# Altium PCB Pulp FMC Sensor Board_8X64Mbits_HyperRam.PcbDoc (part 3 of 3)
Units mm, origin at the board's own origin, x right, y up, seen from the top; angles counter-clockwise.
Board outline 72.9 x 68.96 mm, 4 copper layers (Top Layer, GND, PWR, Bottom Layer), stack 1.56 mm thick; 43 components, 37 nets, 422 pads, 283 vias.
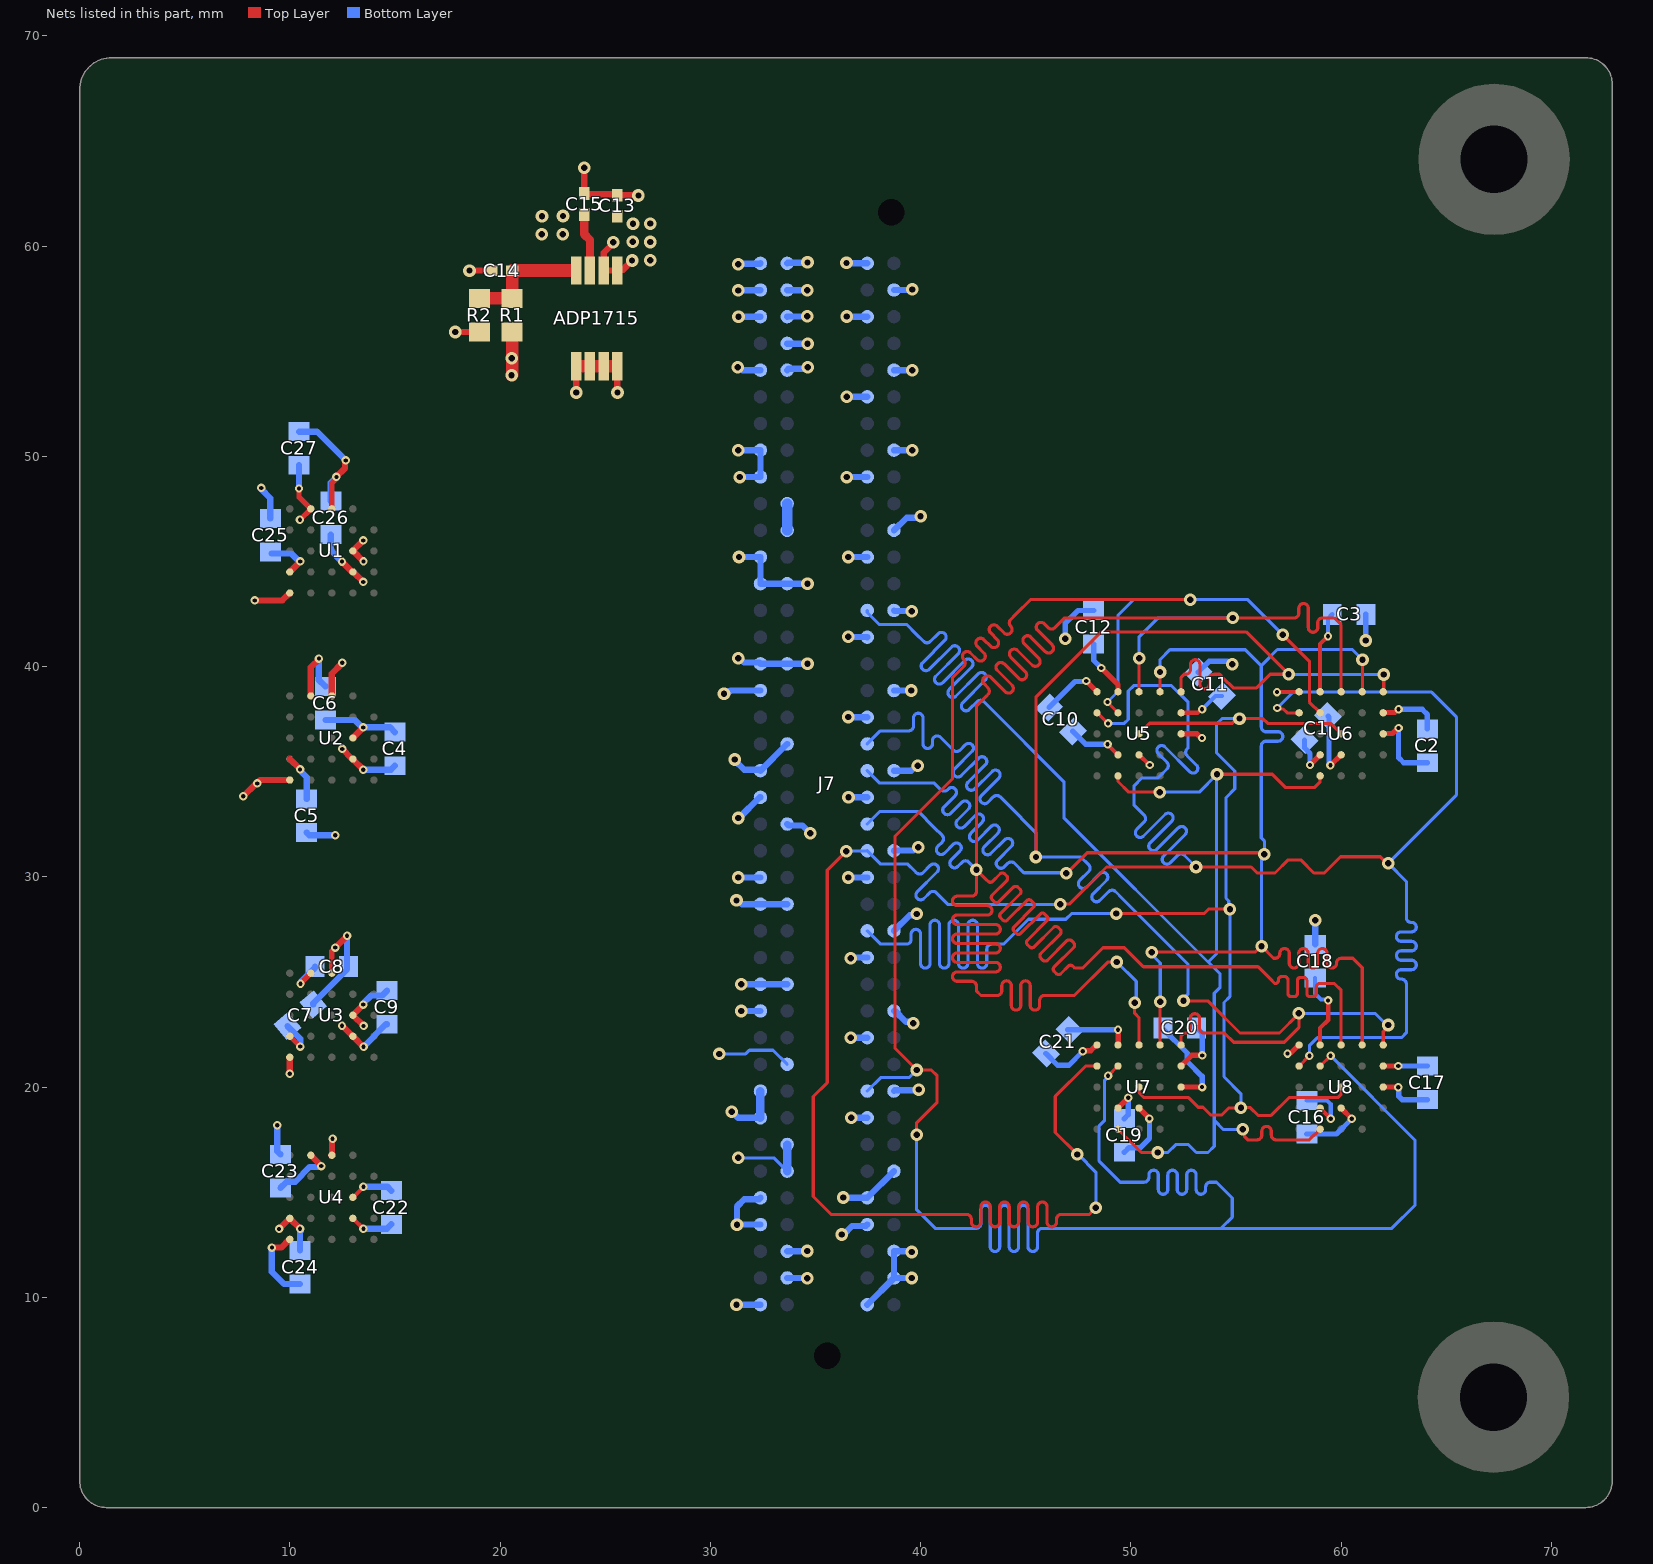
[diagram p5: the nets of this part, all layers, seen from the top]

## Via types
v1: diameter 0.6, hole 0.3, Top Layer to Bottom Layer, tented both sides, 210 vias
v2: diameter 0.4, hole 0.2, Top Layer to Bottom Layer, tented both sides, 73 vias

## Nets (pads, with @x,y where several pads share a name; then routed paths per layer and width w, separated by ;. In a path a pad name is that pad's centre, name@x,y a point inside that pad or via, vN(x,y) a via of type N, cw(c..) or ccw(c..) an arc to the next point about the centre after c; other vN are vias at no path point) (continued)
FMC_HYPER_D3: J7.G9 U5.D4 U6.D4 U7.D4 U8.D4 | length 131.1
  Top Layer w0.15: v1(39.809,17.734) 39.809,18.303 40.785,19.279 40.785,20.537 40.508,20.813 v1(39.809,20.813) 38.778,21.844 38.778,31.93 41.513,34.664 41.513,39.47 42,39.958 42.053,40.011 ccw(c41.894,40.17) 42.053,40.329 cw(c42.212,40.488) 42.053,40.647 cw(c42.212,40.488) 42.371,40.647 42.69,40.329 ccw(c42.849,40.488) 43.008,40.329 ccw(c42.849,40.488) 43.008,40.647 42.69,40.965 cw(c42.849,41.124) 42.69,41.284 cw(c42.849,41.124) 43.008,41.284 43.326,40.965 ccw(c43.485,41.124) 43.644,40.965 ccw(c43.485,41.124) 43.644,41.283 43.326,41.602 cw(c43.485,41.761) 43.326,41.92 cw(c43.485,41.761) 43.644,41.92 43.963,41.601 ccw(c44.122,41.761) 44.281,41.601 ccw(c44.122,41.761) 44.281,41.92 cw(c44.44,42.079) 44.281,42.238 44.53,42.487 45.225,43.182 v1(52.825,43.182) ; v2(48.885,38.315) 48.885,38.308 49.387,37.806 U5.D4@49.387,37.8 ; v2@48.919,20.537 U7.D4@49.387,21.005 ; U7.D4@49.387,21 U7.D4@49.387,21.005 ; U7.D4@49.387,21.01 U7.D4@49.387,21.005 ; v1(57.228,41.515) 58.49,40.253 58.49,38.31 U6.D4@59,37.8 ; U8.D4@59,21 59.012,21 v2(59.499,21.487)
  Bottom Layer w0.15: J7.G9@37.46,19.81 38.097,20.447 39.443,20.447 v1(39.809,20.813) ; v1(39.809,17.734) 39.809,14.166 40.696,13.279 42.125,13.279 42.635,13.279 ccw(c42.635,13.504) 42.86,13.504 42.86,14.153 cw(c43.085,14.153) 43.085,14.378 cw(c43.085,14.153) 43.31,14.153 43.31,12.405 ccw(c43.535,12.405) 43.535,12.18 ccw(c43.535,12.405) 43.76,12.405 43.76,14.153 cw(c43.985,14.153) 43.985,14.378 cw(c43.985,14.153) 44.21,14.153 44.21,12.405 ccw(c44.435,12.405) 44.435,12.18 ccw(c44.435,12.405) 44.66,12.405 44.66,14.153 cw(c44.885,14.153) 44.885,14.378 cw(c44.885,14.153) 45.11,14.153 45.11,12.405 ccw(c45.335,12.405) 45.335,12.18 ccw(c45.335,12.405) 45.56,12.405 45.56,13.054 cw(c45.785,13.054) 45.785,13.279 45.86,13.279 54.285,13.279 ; v2(48.885,38.315) 49.387,38.816 49.387,42.439 50.136,43.188 v1@52.825,43.188 ; v2(48.914,20.537) 48.914,20.487 48.751,20.324 48.751,18.416 48.487,18.152 48.487,16.476 49.488,15.475 50.256,15.475 50.629,15.475 ccw(c50.629,15.7) 50.854,15.7 50.854,15.824 cw(c51.079,15.824) 51.079,16.049 cw(c51.079,15.824) 51.304,15.824 51.304,15.126 ccw(c51.529,15.126) 51.529,14.901 ccw(c51.529,15.126) 51.754,15.126 51.754,15.824 cw(c51.979,15.824) 51.979,16.049 cw(c51.979,15.824) 52.204,15.824 52.204,15.126 ccw(c52.429,15.126) 52.429,14.901 ccw(c52.429,15.126) 52.654,15.126 52.654,15.824 cw(c52.879,15.824) 52.879,16.049 cw(c52.879,15.824) 53.104,15.824 53.104,15.126 ccw(c53.329,15.126) 53.329,14.901 ccw(c53.329,15.126) 53.554,15.126 53.554,15.25 cw(c53.779,15.25) 53.779,15.475 53.854,15.475 54.069,15.475 54.821,14.723 54.821,13.815 54.285,13.279 ; v1(52.825,43.182) 55.561,43.182 v1(57.228,41.515) ; v2(59.499,21.487) 63.51,17.476 63.51,14.377 62.411,13.279 54.285,13.279
FMC_HYPER_D4: J7.G18 U5.D5 U6.D5 U7.D5 U8.D5 | length 146.6
  Top Layer w0.15: v1(36.459,31.215) 35.555,30.311 35.555,20.211 34.893,19.549 34.893,14.797 35.749,13.941 41.682,13.941 42.187,13.941 cw(c42.187,13.716) 42.412,13.716 42.412,13.576 ccw(c42.637,13.576) 42.637,13.351 ccw(c42.637,13.576) 42.862,13.576 42.862,14.307 cw(c43.087,14.307) 43.087,14.532 cw(c43.087,14.307) 43.312,14.307 43.312,13.576 ccw(c43.537,13.576) 43.537,13.351 ccw(c43.537,13.576) 43.762,13.576 43.762,14.307 cw(c43.987,14.307) 43.987,14.532 cw(c43.987,14.307) 44.212,14.307 44.212,13.576 ccw(c44.437,13.576) 44.437,13.351 ccw(c44.437,13.576) 44.662,13.576 44.662,14.307 cw(c44.887,14.307) 44.887,14.532 cw(c44.887,14.307) 45.112,14.307 45.112,13.576 ccw(c45.337,13.576) 45.337,13.351 ccw(c45.337,13.576) 45.562,13.576 45.562,14.307 cw(c45.787,14.307) 45.787,14.532 cw(c45.787,14.307) 46.012,14.307 46.012,13.576 ccw(c46.237,13.576) 46.237,13.351 ccw(c46.237,13.576) 46.462,13.576 46.462,13.716 cw(c46.687,13.716) 46.687,13.941 46.762,13.941 48.018,13.941 v1(48.333,14.256) ; v1(46.634,28.7) 47.075,28.7 48.84,30.465 v1(53.096,30.465) 55.72,30.465 56.002,30.183 56.855,30.183 57.479,30.807 58.08,30.807 58.704,30.183 59.198,30.183 59.966,30.951 61.866,30.951 62.176,30.641 v1(62.237,30.641) ; v1(47.448,16.796) 46.405,17.839 46.405,19.558 47.847,21 U7.D5@48.387,21 ; U5.D5@48.387,37.808 U5.D5@48.387,37.8 48.398,37.8 v2@48.914,37.284 ; v2(56.957,38.031) 57.005,37.983 57.241,37.983 57.428,37.796 U6.D5@57.996,37.796 ; U8.D5@58,21 U8.D5@58,21 v2(58.49,21.487) v2(58.49,21.487)
  Bottom Layer w0.15: v1(36.459,31.215) 36.471,31.227 37.447,31.227 J7.G18@37.46,31.24 38.097,30.603 39.391,30.603 39.743,30.251 39.796,30.198 ccw(c39.955,30.357) 40.114,30.198 40.461,30.545 cw(c40.62,30.386) 40.779,30.545 cw(c40.62,30.386) 40.779,30.227 39.84,29.288 ccw(c39.999,29.129) 39.84,28.969 ccw(c39.999,29.129) 40.158,28.969 40.432,29.243 cw(c40.591,29.084) 40.75,29.243 41.151,28.843 41.314,28.68 46.614,28.68 v1(46.634,28.7) ; v1(47.448,16.796) 47.492,16.796 48.333,15.955 v1(48.333,14.256) ; v2(48.914,37.296) 49.682,37.296 49.87,37.484 49.87,38.837 50.13,39.096 51.93,39.096 52.722,38.303 52.722,36.653 52.722,36.136 52.669,36.083 ccw(c52.829,35.923) 52.669,35.764 53.119,35.315 cw(c52.96,35.156) 53.119,34.997 cw(c52.96,35.156) 52.801,34.997 51.622,36.175 ccw(c51.463,36.016) 51.304,36.175 ccw(c51.463,36.016) 51.304,35.857 51.715,35.446 cw(c51.556,35.287) 51.715,35.128 51.387,34.8 51.291,34.704 50.527,34.704 50.154,34.33 50.154,33.407 50.256,33.306 50.632,32.929 cw(c50.473,32.77) 50.632,32.611 50.278,32.258 ccw(c50.437,32.099) 50.278,31.94 ccw(c50.437,32.099) 50.597,31.94 51.622,32.965 cw(c51.781,32.806) 51.94,32.965 cw(c51.781,32.806) 51.94,32.646 50.915,31.621 ccw(c51.074,31.462) 50.915,31.303 ccw(c51.074,31.462) 51.233,31.303 52.258,32.328 cw(c52.417,32.169) 52.576,32.328 cw(c52.417,32.169) 52.576,32.01 51.551,30.985 ccw(c51.71,30.826) 51.551,30.667 ccw(c51.71,30.826) 51.869,30.667 52.223,31.02 cw(c52.382,30.861) 52.541,31.02 52.594,30.967 v1(53.096,30.465) ; v2(56.957,38.031) 57.711,38.786 64.302,38.786 65.482,37.605 65.482,33.887 v1(62.237,30.641) 63.1,29.777 63.1,28.629 63.1,28.057 ccw(c63.325,28.057) 63.325,27.832 63.348,27.832 cw(c63.348,27.607) 63.573,27.607 cw(c63.348,27.607) 63.348,27.382 62.852,27.382 ccw(c62.852,27.157) 62.627,27.157 ccw(c62.852,27.157) 62.852,26.932 63.348,26.932 cw(c63.348,26.707) 63.573,26.707 cw(c63.348,26.707) 63.348,26.482 62.852,26.482 ccw(c62.852,26.257) 62.627,26.257 ccw(c62.852,26.257) 62.852,26.032 63.348,26.032 cw(c63.348,25.807) 63.573,25.807 cw(c63.348,25.807) 63.348,25.582 62.852,25.582 ccw(c62.852,25.357) 62.627,25.357 ccw(c62.852,25.357) 62.852,25.132 62.875,25.132 cw(c62.875,24.907) 63.1,24.907 63.1,24.832 63.1,22.58 62.87,22.35 58.871,22.35 58.49,21.969 v2(58.49,21.487)
FMC_HYPER_D5: J7.G19 U5.E3 U6.E3 U7.E3 U8.E3 | length 143.3
  Top Layer w0.15: v1@49.329,25.945 48.896,25.945 47.308,24.356 45.961,24.356 45.886,24.356 ccw(c45.886,24.131) 45.661,24.131 45.661,23.883 cw(c45.436,23.883) 45.436,23.658 cw(c45.436,23.883) 45.211,23.883 45.211,24.83 ccw(c44.986,24.83) 44.986,25.055 ccw(c44.986,24.83) 44.761,24.83 44.761,23.883 cw(c44.536,23.883) 44.536,23.658 cw(c44.536,23.883) 44.311,23.883 44.311,24.83 ccw(c44.086,24.83) 44.086,25.055 ccw(c44.086,24.83) 43.861,24.83 43.861,24.581 cw(c43.636,24.581) 43.636,24.356 43.149,24.356 42.868,24.356 42.652,24.572 42.652,24.729 42.652,24.804 ccw(c42.427,24.804) 42.427,25.029 41.738,25.029 cw(c41.738,25.254) 41.513,25.254 cw(c41.738,25.254) 41.738,25.479 43.565,25.479 ccw(c43.565,25.704) 43.79,25.704 ccw(c43.565,25.704) 43.565,25.929 41.738,25.929 cw(c41.738,26.154) 41.513,26.154 cw(c41.738,26.154) 41.738,26.379 43.565,26.379 ccw(c43.565,26.604) 43.79,26.604 ccw(c43.565,26.604) 43.565,26.829 41.738,26.829 cw(c41.738,27.054) 41.513,27.054 cw(c41.738,27.054) 41.738,27.279 43.565,27.279 ccw(c43.565,27.504) 43.79,27.504 ccw(c43.565,27.504) 43.565,27.729 41.738,27.729 cw(c41.738,27.954) 41.513,27.954 cw(c41.738,27.954) 41.738,28.179 43.168,28.179 ccw(c43.168,28.404) 43.393,28.404 ccw(c43.168,28.404) 43.168,28.629 41.738,28.629 cw(c41.738,28.854) 41.513,28.854 cw(c41.738,28.854) 41.738,29.079 42.427,29.079 ccw(c42.427,29.304) 42.652,29.304 42.652,29.831 v1(42.652,30.339) ; v1(50.178,24.008) 50.178,23.512 50.387,23.303 U7.E3@50.387,22 ; U5.E3@50.387,38.8 50.39,38.803 50.39,40.394 v1(50.393,40.397) ; U8.E3@60,22 60,24.602 59.681,24.921 58.975,24.921 ccw(c58.975,24.764) 58.817,24.764 58.817,24.457 cw(c58.66,24.457) 58.66,24.3 58.525,24.3 cw(c58.525,24.457) 58.367,24.457 58.367,25.06 ccw(c58.21,25.06) 58.21,25.218 58.075,25.218 ccw(c58.075,25.06) 57.917,25.06 57.917,24.457 cw(c57.76,24.457) 57.76,24.3 57.625,24.3 cw(c57.625,24.457) 57.467,24.457 57.467,25.101 ccw(c57.31,25.101) 57.31,25.258 57.175,25.258 ccw(c57.175,25.101) 57.017,25.101 57.017,25.079 cw(c56.86,25.079) 56.86,24.921 56.856,24.921 56.627,25.15 56.053,25.725 50.591,25.725 49.688,26.628 48.671,26.628 47.7,25.658 47.568,25.658 47.333,25.658 47.243,25.747 ccw(c47.132,25.636) 47.02,25.747 46.672,25.399 cw(c46.561,25.51) 46.449,25.399 46.354,25.495 cw(c46.465,25.606) 46.354,25.717 47.273,26.636 ccw(c47.162,26.748) 47.273,26.859 47.178,26.955 ccw(c47.066,26.843) 46.955,26.955 46.036,26.035 cw(c45.924,26.147) 45.813,26.035 45.718,26.131 cw(c45.829,26.242) 45.718,26.354 46.637,27.273 ccw(c46.525,27.384) 46.637,27.496 46.541,27.591 ccw(c46.43,27.48) 46.319,27.591 45.399,26.672 cw(c45.288,26.783) 45.177,26.672 45.081,26.767 cw(c45.193,26.879) 45.081,26.99 46,27.909 ccw(c45.889,28.021) 46,28.132 45.905,28.227 ccw(c45.794,28.116) 45.682,28.227 44.763,27.308 cw(c44.652,27.42) 44.54,27.308 44.445,27.404 cw(c44.556,27.515) 44.445,27.626 45.364,28.546 ccw(c45.253,28.657) 45.364,28.768 45.269,28.864 ccw(c45.157,28.753) 45.046,28.864 44.127,27.945 cw(c44.015,28.056) 43.904,27.945 43.808,28.04 cw(c43.92,28.152) 43.808,28.263 44.728,29.182 ccw(c44.616,29.293) 44.728,29.405 44.632,29.5 ccw(c44.521,29.389) 44.409,29.5 43.723,28.814 cw(c43.612,28.925) 43.5,28.814 43.405,28.909 cw(c43.516,29.021) 43.405,29.132 44.091,29.818 ccw(c43.98,29.93) 44.091,30.041 43.996,30.137 ccw(c43.884,30.025) 43.773,30.137 43.425,29.788 cw(c43.313,29.9) 43.202,29.788 43.149,29.841 v1(42.652,30.339) ; U6.E3@60,38.8 60,41.981 59.667,42.314 59.625,42.314 59.111,42.314 ccw(c59.111,42.089) 58.887,42.089 58.887,41.855 cw(c58.662,41.855) 58.662,41.63 cw(c58.662,41.855) 58.437,41.855 58.437,42.772 ccw(c58.212,42.772) 58.212,42.997 ccw(c58.212,42.772) 57.987,42.772 57.987,42.539 cw(c57.762,42.539) 57.762,42.314 57.686,42.314 46.846,42.314 46.708,42.176 46.384,41.852 cw(c46.225,42.011) 46.066,41.852 45.88,42.038 ccw(c45.721,41.878) 45.562,42.038 ccw(c45.721,41.878) 45.562,41.719 46.251,41.03 cw(c46.092,40.871) 46.251,40.712 cw(c46.092,40.871) 45.933,40.712 45.244,41.401 ccw(c45.085,41.242) 44.926,41.401 ccw(c45.085,41.242) 44.926,41.083 45.615,40.394 cw(c45.456,40.235) 45.615,40.076 cw(c45.456,40.235) 45.297,40.076 44.607,40.765 ccw(c44.448,40.606) 44.289,40.765 ccw(c44.448,40.606) 44.289,40.447 44.979,39.757 cw(c44.819,39.598) 44.979,39.439 cw(c44.819,39.598) 44.66,39.439 43.971,40.128 ccw(c43.812,39.969) 43.653,40.128 ccw(c43.812,39.969) 43.653,39.81 44.342,39.121 cw(c44.183,38.962) 44.342,38.803 cw(c44.183,38.962) 44.024,38.803 43.335,39.492 ccw(c43.176,39.333) 43.016,39.492 ccw(c43.176,39.333) 43.016,39.174 43.202,38.988 cw(c43.043,38.829) 43.202,38.67 43.149,38.617 42.652,38.12 v1(42.652,30.339)
  Bottom Layer w0.15: J7.G19@37.46,32.51 38.063,33.113 39.877,33.113 40.65,32.341 41.021,31.97 cw(c40.862,31.811) 41.021,31.651 40.814,31.445 ccw(c40.973,31.286) 40.814,31.127 ccw(c40.973,31.286) 41.132,31.127 41.547,31.541 cw(c41.706,31.382) 41.865,31.541 cw(c41.706,31.382) 41.865,31.223 41.451,30.809 ccw(c41.61,30.65) 41.451,30.49 ccw(c41.61,30.65) 41.769,30.49 41.975,30.697 cw(c42.134,30.538) 42.294,30.697 42.621,30.37 v1(42.652,30.339) ; v1(49.333,25.949) 50.257,25.026 50.257,24.086 v1(50.178,24.008) ; v1(50.393,40.397) 50.38,40.41 50.38,41.395 51.298,42.314 v1(54.846,42.314)
FMC_HYPER_D6: J7.G21 U5.E2 U6.E2 U7.E2 U8.E2 | length 83.7
  Top Layer w0.15: v1@46.944,30.167 47.923,31.147 56.267,31.147 v1(56.347,31.067) ; v1(50.992,26.416) 55.902,26.416 56.178,26.693 v1(56.215,26.693) 56.782,26.125 56.857,26.125 ccw(c56.857,26.35) 57.082,26.35 57.082,26.362 cw(c57.307,26.362) 57.307,26.587 cw(c57.307,26.362) 57.532,26.362 57.532,25.888 ccw(c57.757,25.888) 57.757,25.663 ccw(c57.757,25.888) 57.982,25.888 57.982,26.362 cw(c58.207,26.362) 58.207,26.587 cw(c58.207,26.362) 58.432,26.362 58.432,25.888 ccw(c58.657,25.888) 58.657,25.663 ccw(c58.657,25.888) 58.882,25.888 58.882,26.362 cw(c59.107,26.362) 59.107,26.587 cw(c59.107,26.362) 59.332,26.362 59.332,25.888 ccw(c59.557,25.888) 59.557,25.663 ccw(c59.557,25.888) 59.782,25.888 59.782,25.9 cw(c60.007,25.9) 60.007,26.125 60.423,26.125 60.554,26.125 61,25.679 U8.E2@61,22 ; U7.E2@51.387,22 51.389,22.002 51.389,24.061 v1(51.392,24.063) ; U5.E2@51.387,38.8 v1(51.387,39.74) ; U6.E2@61,38.8 61.008,38.808 61.008,40.319 v1(61.017,40.328)
  Bottom Layer w0.15: J7.G21@37.46,35.05 38.055,34.455 40.65,34.455 40.91,34.194 40.964,34.141 ccw(c41.123,34.3) 41.282,34.141 41.319,34.179 cw(c41.479,34.02) 41.638,34.179 cw(c41.479,34.02) 41.638,33.861 41.115,33.337 ccw(c41.274,33.178) 41.115,33.019 ccw(c41.274,33.178) 41.433,33.019 41.956,33.542 cw(c42.115,33.383) 42.274,33.542 cw(c42.115,33.383) 42.274,33.224 41.751,32.701 ccw(c41.91,32.542) 41.751,32.383 ccw(c41.91,32.542) 42.069,32.383 42.606,32.92 cw(c42.765,32.761) 42.924,32.92 ; 42.924,32.92 cw(c42.765,32.761) 42.924,32.602 42.387,32.065 ccw(c42.546,31.906) 42.387,31.747 ccw(c42.546,31.906) 42.706,31.747 43.358,32.399 cw(c43.517,32.24) 43.676,32.399 cw(c43.517,32.24) 43.676,32.081 43.024,31.428 ccw(c43.183,31.269) 43.024,31.11 ccw(c43.183,31.269) 43.342,31.11 43.994,31.763 cw(c44.154,31.604) 44.313,31.763 cw(c44.154,31.604) 44.313,31.444 43.66,30.792 ccw(c43.819,30.633) 43.66,30.474 ccw(c43.819,30.633) 43.978,30.474 44.145,30.641 cw(c44.305,30.482) 44.464,30.641 44.91,30.195 45.251,30.195 46.901,30.195 v1(46.929,30.167) ; v1(50.992,26.416) 50.992,26.304 51.393,25.903 51.393,24.065 v1(51.392,24.063) ; v1(51.387,39.74) 51.387,40.335 51.851,40.8 55.445,40.8 56.202,40.043 ; v1(56.215,26.693) 56.215,30.812 56.347,30.945 56.347,31.71 56.202,31.855 56.202,35.4 56.202,36.225 cw(c56.427,36.225) 56.427,36.45 57.003,36.45 ccw(c57.003,36.675) 57.228,36.675 ccw(c57.003,36.675) 57.003,36.9 56.427,36.9 cw(c56.427,37.125) 56.202,37.125 56.202,37.2 56.202,40.043 ; v1(61.017,40.328) 60.535,40.809 56.969,40.809 56.202,40.043
FMC_HYPER_D7: J7.G22 U5.E1 U6.E1 U7.E1 U8.E1 | length 93.9
  Top Layer w0.15: v1(45.482,30.943) 45.482,38.538 48.593,41.649 55.482,41.649 v1(57.499,39.632) 56.621,39.632 55.977,38.988 54.862,38.988 54.399,39.451 54.218,39.632 53.958,39.632 ccw(c53.958,39.407) 53.733,39.407 53.733,39.165 cw(c53.508,39.165) 53.508,38.94 cw(c53.508,39.165) 53.283,39.165 53.283,40.1 ccw(c53.058,40.1) 53.058,40.325 ccw(c53.058,40.1) 52.833,40.1 52.833,39.857 cw(c52.608,39.857) 52.608,39.632 52.533,39.632 52.387,39.487 U5.E1@52.387,38.8 ; U7.E1@52.387,22 52.387,22.434 52.519,22.566 52.594,22.566 ccw(c52.594,22.791) 52.819,22.791 52.819,23.265 cw(c53.044,23.265) 53.044,23.49 cw(c53.044,23.265) 53.269,23.265 53.269,22.791 ccw(c53.494,22.791) 53.494,22.566 54.106,22.566 54.454,22.566 54.887,22.133 57.293,22.133 57.988,22.828 v1@57.988,23.493 ; v1(52.503,24.1) 53.663,24.1 55.189,22.574 57.069,22.574 v1@57.988,23.493 ; v1(57.988,23.504) v1@57.988,23.493 ; U8.E1@62,22 62,22.64 62.237,22.876 v1@62.237,22.952 ; U6.E1@62,38.8 62.028,38.828 v1(62.028,39.624)
  Bottom Layer w0.15: J7.G22@37.46,36.32 38.082,36.942 39.359,36.942 39.434,36.942 ccw(c39.434,37.167) 39.659,37.167 39.659,37.556 cw(c39.884,37.556) 39.884,37.781 cw(c39.884,37.556) 40.109,37.556 40.109,36.328 ccw(c40.334,36.328) 40.334,36.103 ccw(c40.334,36.328) 40.559,36.328 40.559,36.476 cw(c40.784,36.476) 40.943,36.635 41.499,36.08 41.552,36.027 ccw(c41.711,36.186) 41.87,36.027 42.125,36.282 cw(c42.284,36.123) 42.443,36.282 cw(c42.284,36.123) 42.443,35.964 41.615,35.136 ccw(c41.774,34.976) 41.615,34.817 ccw(c41.774,34.976) 41.933,34.817 42.761,35.646 cw(c42.92,35.487) 43.08,35.646 cw(c42.92,35.487) 43.08,35.328 42.251,34.499 ccw(c42.41,34.34) 42.251,34.181 ccw(c42.41,34.34) 42.569,34.181 43.398,35.01 cw(c43.557,34.85) 43.716,35.01 cw(c43.557,34.85) 43.716,34.691 42.887,33.863 ccw(c43.046,33.704) 42.887,33.545 ccw(c43.046,33.704) 43.206,33.545 43.461,33.8 cw(c43.62,33.641) 43.779,33.8 44.089,33.49 45.482,32.097 v1(45.482,30.943) 47.62,30.943 47.992,30.572 cw(c47.833,30.412) 47.992,30.253 47.569,29.831 ccw(c47.728,29.671) 47.569,29.512 ccw(c47.728,29.671) 47.887,29.512 48.519,30.144 cw(c48.678,29.985) 48.837,30.144 cw(c48.678,29.985) 48.837,29.826 48.205,29.194 ccw(c48.364,29.035) 48.205,28.876 ccw(c48.364,29.035) 48.523,28.876 48.946,29.299 cw(c49.105,29.14) 49.264,29.299 49.578,28.985 52.709,25.855 52.709,24.413 52.503,24.207 v1(52.503,24.1) ; v1@57.474,39.608 v1(57.499,39.632) 57.503,39.628 62.023,39.628 v1(62.028,39.624) ; v1@57.992,23.5 61.625,23.5 62.172,22.952 v1(62.237,22.952)
FMC_HYPER_RESET: J7.G27 U5.A4 U6.A4 U7.A4 U8.A4 | length 79.5
  Top Layer w0.15: U7.A4@49.387,18 50.5,16.887 v1(51.271,16.887) ; U5.A4@49.387,34.8 49.389,34.798 49.389,34.536 49.896,34.029 v1(51.372,34.029) ; v1(54.096,34.875) 56.732,34.875 57.365,34.241 58.721,34.241 59,34.521 U6.A4@59,34.8 ; v1(55.322,18) 55.408,17.914 55.408,17.63 55.549,17.489 55.926,17.489 56.001,17.489 ccw(c56.001,17.714) 56.226,17.714 56.226,17.906 cw(c56.451,17.906) 56.451,18.131 cw(c56.451,17.906) 56.676,17.906 56.676,17.714 ccw(c56.901,17.714) 56.901,17.489 57.617,17.489 58.49,17.489 U8.A4@59,18
  Bottom Layer w0.15: J7.G27@37.46,42.67 37.46,42.572 38.033,41.999 39.336,41.999 39.791,41.545 40.142,41.194 ccw(c40.301,41.353) 40.46,41.194 40.829,41.563 cw(c40.988,41.404) 41.147,41.563 cw(c40.988,41.404) 41.147,41.244 40.091,40.189 ccw(c40.25,40.029) 40.091,39.87 ccw(c40.25,40.029) 40.409,39.87 41.465,40.926 cw(c41.624,40.767) 41.783,40.926 cw(c41.624,40.767) 41.783,40.608 40.728,39.552 ccw(c40.887,39.393) 40.728,39.234 ccw(c40.887,39.393) 41.046,39.234 42.102,40.29 cw(c42.261,40.131) 42.42,40.29 cw(c42.261,40.131) 42.42,39.972 41.364,38.916 ccw(c41.523,38.757) 41.364,38.598 ccw(c41.523,38.757) 41.682,38.598 42.738,39.653 cw(c42.897,39.494) 43.056,39.653 cw(c42.897,39.494) 43.056,39.335 42,38.279 ccw(c42.159,38.12) 42,37.961 ccw(c42.159,38.12) 42.319,37.961 42.687,38.33 cw(c42.847,38.171) 43.006,38.33 43.059,38.277 46.813,34.523 46.813,32.804 53.669,25.948 ; v1(51.271,16.887) 51.754,16.887 52.128,17.261 52.742,17.261 53.116,16.887 53.667,16.887 53.966,17.186 53.966,18.416 ; v1(51.372,34.029) 53.25,34.029 v1(54.096,34.875) ; v1@54.069,34.847 54.069,26.341 53.675,25.948 54.244,25.379 54.244,24.745 53.966,24.467 53.966,18.416 ; v1(55.322,18) 55.299,17.977 54.405,17.977 53.966,18.416
FMC_HYPER_RWDS: J7.G15 U5.C3 U6.C3 U7.C3 U8.C3 | length 75.9
  Top Layer w0.15: v1(49.303,28.251) 53.477,28.251 53.694,28.469 54.704,28.469 v1(54.709,28.464) ; U7.C3@50.388,19.999 50.388,19.735 50.623,19.5 52.743,19.5 53.204,19.04 53.431,19.04 53.799,18.671 54.326,18.671 54.666,19.012 v1@55.223,19.012 ; U5.C3@50.387,36.8 50.89,37.303 54.821,37.303 55.044,37.526 v1(55.166,37.526) 56.275,37.526 56.501,37.299 59.501,37.299 U6.C3@60,36.8 ; v1(55.232,19.021) 55.675,19.021 56.046,18.651 56.668,18.651 57.517,19.5 59.844,19.5 60,19.656 U8.C3@60,20
  Bottom Layer w0.15: J7.G15@37.46,27.43 38.094,26.796 39.246,26.796 39.321,26.796 ccw(c39.321,27.021) 39.546,27.021 39.546,27.278 cw(c39.771,27.278) 39.771,27.503 cw(c39.771,27.278) 39.996,27.278 39.996,25.883 ccw(c40.221,25.883) 40.221,25.658 ccw(c40.221,25.883) 40.446,25.883 40.446,27.71 cw(c40.671,27.71) 40.671,27.935 cw(c40.671,27.71) 40.896,27.71 40.896,25.883 ccw(c41.121,25.883) 41.121,25.658 ccw(c41.121,25.883) 41.346,25.883 41.346,27.71 cw(c41.571,27.71) 41.571,27.935 cw(c41.571,27.71) 41.796,27.71 41.796,25.883 ccw(c42.021,25.883) 42.021,25.658 ccw(c42.021,25.883) 42.246,25.883 42.246,27.71 cw(c42.471,27.71) 42.471,27.935 cw(c42.471,27.71) 42.696,27.71 42.696,25.883 ccw(c42.921,25.883) 42.921,25.658 ccw(c42.921,25.883) 43.146,25.883 43.146,26.571 cw(c43.371,26.571) 43.371,26.796 43.943,26.796 45.127,27.98 46.904,27.98 47.175,28.251 v1(49.303,28.251) ; v1(55.166,37.526) 54.334,37.526 54.071,37.263 54.071,35.903 54.941,35.033 54.941,34.181 54.521,33.761 54.521,28.985 54.655,28.851 54.655,28.519 v1(54.709,28.464) 54.709,24.303 54.426,24.019 54.426,20.496 55.232,19.689 v1(55.232,19.021)
GND: ADP1715.5 ADP1715.6 ADP1715.7 ADP1715.8 C1.1 C2.1 C3.1 C4.1 C5.1 C6.1 C7.1 C8.1 C9.1 C10.1 C11.1 C12.1 C13.1 C14.2 C15.2 C16.1 C17.1 C18.1 C19.1 C20.1 C21.1 C22.1 C23.1 C24.1 C25.1 C26.1 C27.1 J7.C1 J7.C4 J7.C5 J7.C8 J7.C9 J7.C12 J7.C13 J7.C16 J7.C17 J7.C20 J7.C21 J7.C24 J7.C25 J7.C28 J7.C29 J7.C32 J7.C33 J7.C36 J7.C38 J7.C40 J7.D2 J7.D3 J7.D6 J7.D7 J7.D10 J7.D13 J7.D16 J7.D19 J7.D22 J7.D25 J7.D28 J7.D37 J7.D39 J7.G1 J7.G4 J7.G5 J7.G8 J7.G11 J7.G14 J7.G17 J7.G20 J7.G23 J7.G26 J7.G29 J7.G32 J7.G35 J7.G38 J7.G40 J7.H2 J7.H3 J7.H6 J7.H9 J7.H12 J7.H15 J7.H18 J7.H21 J7.H24 J7.H27 J7.H30 J7.H33 J7.H36 J7.H39 R2.1 U1.B3 U1.C1 U1.E5 U2.B3 U2.C1 U2.E5 U3.B3 U3.C1 U3.E5 U4.B3 U4.C1 U4.E5 U5.B3 U5.C1 U5.E5 U6.B3 U6.C1 U6.E5 U7.B3 U7.C1 U7.E5 U8.B3 U8.C1 U8.E5 | length 165.1
  Top Layer w0.2: U4.B3@12.995,14.755 v2@13.496,15.255 ; U5.B3@50.394,35.8 v2@50.877,35.317 ; v2@56.955,38.793 U6.E5@57.993,38.793
  Top Layer w0.25: U3.C1@11.995,25.417 11.995,26.471 v2(12.159,26.635) ; U1.C1@11.995,47.5 11.995,48.735 12.21,48.95 v2(12.21,49.02) ; v2(47.713,21.703) 47.741,21.732 48.091,21.732 48.36,22 U7.E5@48.387,22 ; v2@47.873,39.314 U5.E5@48.387,38.8 ; U7.B3@50.387,19 50.882,18.505 v2@50.887,18.505 ; U7.C1@52.387,20 v2(53.387,20) ; U5.C1@52.387,36.8 53.141,36.8 53.341,36.6 v2(53.381,36.6) ; v2(56.949,38.786) v2@56.955,38.793 ; v2(57.449,21.59) 57.477,21.619 57.603,21.619 57.984,22 U8.E5@58,22 ; v2(59.491,35.308) 59.5,35.308 59.991,35.8 U6.B3@60,35.8 ; U8.B3@60,19 v2(60.507,18.493) ; U8.C1@62,20 62.707,20 v2(62.715,19.992) ; U6.C1@62,36.8 62.019,36.819 62.434,36.819 62.692,37.077 v2(62.733,37.077)
  Top Layer w0.3: v2(7.782,33.831) 8.392,34.441 v2(8.448,34.441) ; v2(8.332,43.145) 9.64,43.145 U1.E5@9.995,43.5 ; v2@8.432,34.457 8.577,34.602 U2.E5@9.995,34.602 ; v2@9.139,12.365 9.59,12.365 9.981,12.755 U4.E5@9.995,12.755 ; v2(9.995,20.635) U3.E5@9.995,21.417 ; U4.C1@11.995,16.755 12.004,16.765 12.004,17.517 v2(12.031,17.544) ; U2.C1@11.995,38.602 11.995,39.664 v2@12.478,40.147 ; v2(12.159,26.635) v2(12.719,27.195) ; v2(12.21,49.02) 12.618,49.429 12.618,49.768 v2(12.658,49.808) ; U3.B3@12.995,23.417 v2(13.503,22.907) ; U3.B3@12.995,23.417 12.995,23.42 13.493,23.918 v2(13.493,23.922) ; U2.B3@12.995,36.602 v2@13.493,37.1 ; v2(13.489,45.999) 13.489,45.997 12.995,45.502 U1.B3@12.995,45.5 12.999,45.5 13.495,45.004 v2(13.5,45.004) ; v1(17.87,55.913) R2.1@19.016,55.913 ; v1(18.541,58.835) 18.544,58.838 C14.2@19.566,58.838 ; v1(23.617,53.035) 23.62,53.038 23.62,54.285 ADP1715.5@23.622,54.288 ; v1(24,63.726) C15.2@24,62.5 24.042,62.458 25.53,62.458 C13.1@25.572,62.416 25.578,62.411 26.571,62.411 v1(26.576,62.405) ; ADP1715.8@25.572,54.288 25.572,53.048 v1(25.582,53.038)
  Top Layer w0.6: ADP1715.5@23.805,54.288 ADP1715.6@24.272,54.288 ADP1715.7@24.922,54.288 ADP1715.8@25.364,54.288
  Bottom Layer w0.15: v1(30.427,21.576) 31.673,21.576 31.851,21.754 32.976,21.754 J7.D10@33.65,21.08 ; v1(31.321,16.633) 33.017,16.633 J7.D6@33.65,16
  Bottom Layer w0.25: C21.1@45.955,21.591 46.505,21.04 47.05,21.04 v2(47.713,21.703) ; C10.1@46.106,38.05 47.341,39.284 47.843,39.284 v2(47.872,39.313) ; v1(46.884,41.322) 46.874,41.333 46.874,42.057 47.481,42.665 C12.1@48.231,42.665 ; C19.1@49.688,16.898 49.908,17.118 50.45,17.118 50.88,17.548 v2(50.88,18.501) ; C20.1@51.527,22.77 52.682,21.614 52.682,21.216 53.388,20.51 v2@53.388,20.001 ; C11.1@53.202,39.729 53.722,40.249 54.579,40.249 54.721,40.107 v1(54.816,40.107) ; C16.1@58.367,17.765 59.779,17.765 v2(60.507,18.493) ; C1.1@59.383,37.642 59.418,37.607 59.418,35.421 59.491,35.349 v2(59.491,35.308) ; v1(61.175,41.239) C3.1@61.175,42.483 ; v2(62.715,19.992) 62.743,19.964 62.743,19.546 62.89,19.4 C17.1@64.1,19.4 ; v2(62.733,37.077) 62.733,35.667 62.975,35.425 C2.1@64.1,35.425
  Bottom Layer w0.3: v2(8.636,48.5) 8.636,48.444 9.071,48.009 C25.1@9.071,47.047 ; v2(9.141,12.367) 9.141,11.222 9.733,10.63 C24.1@10.483,10.63 ; v2(9.398,18.183) 9.398,16.95 C23.1@9.548,16.8 ; C27.1@10.443,51.175 11.291,51.175 v2(12.658,49.808) ; C5.1@10.794,32.105 10.924,31.975 v2(12.159,31.975) ; C7.1@11.107,23.931 11.107,23.987 12.719,25.599 v2(12.719,27.195) ; C6.1@11.69,37.46 13.075,37.46 13.429,37.107 v2(13.485,37.107) 14.764,37.107 C4.1@14.989,36.882 ; C26.1@11.945,47.872 11.945,48.748 12.21,49.012 v2(12.21,49.02) ; v2(13.493,23.922) 13.493,23.978 13.867,24.353 14.384,24.353 C9.1@14.617,24.587 ; v2(13.497,15.255) 14.64,15.255 C22.1@14.825,15.071 ; v1(30.648,38.702) 30.798,38.702 30.956,38.86 J7.C24@32.38,38.86 ; v1(31.02,18.832) 31.312,18.54 J7.C8@32.38,18.54 ; v1(31.164,35.579) 31.164,35.534 31.61,35.089 32.341,35.089 J7.C21@32.38,35.05 J7.D22@33.65,36.32 ; v1(31.241,9.65) J7.C1@32.38,9.65 ; v1(31.241,28.877) 31.322,28.877 31.499,28.7 J7.C16@32.38,28.7 J7.D16@33.65,28.7 ; v1(31.306,54.243) 31.387,54.243 31.53,54.1 J7.C36@32.38,54.1 ; v1(31.321,29.97) J7.C17@32.38,29.97 ; v1(31.321,40.398) 31.402,40.398 31.61,40.19 32.32,40.19 J7.C25@32.38,40.13 J7.D25@33.65,40.13 34.487,40.13 34.49,40.128 v1(34.617,40.128) ; v1(31.321,59.138) 31.342,59.159 32.359,59.159 J7.C40@32.38,59.18 ; v1(31.322,32.799) 31.361,32.799 32.341,33.78 J7.C20@32.38,33.78 ; v1(31.322,50.29) J7.C33@32.38,50.29 J7.C32@32.38,49.02 32.376,49.016 31.406,49.016 v1(31.402,49.012) ; v1(31.338,56.642) v1(31.338,56.642) 32.379,56.641 J7.C38@32.38,56.64 ; v1(31.361,45.21) J7.C29@32.38,45.21 J7.C28@32.38,43.94 J7.D28@33.65,43.94 v1(34.617,43.94) ; v1(31.471,23.62) J7.C12@32.38,23.62 ; v1(31.471,24.89) J7.C13@32.38,24.89 J7.D13@33.65,24.89 ; J7.C4@32.38,13.46 31.276,13.46 v1(31.264,13.448) 31.264,14.321 31.61,14.666 32.316,14.666 J7.C5@32.38,14.73 ; J7.D2@33.65,10.92 33.655,10.915 34.599,10.915 v1(34.604,10.91) ; J7.D3@33.65,12.19 33.656,12.196 34.593,12.196 v1(34.599,12.202) ; J7.D19@33.65,32.51 33.715,32.445 34.375,32.445 v1(34.745,32.075) ; J7.D37@33.65,55.37 33.66,55.36 34.612,55.36 v1(34.622,55.351) ; J7.D39@33.65,57.91 33.656,57.904 34.603,57.904 v1(34.609,57.898) ; v1(36.252,12.987) 36.333,12.987 36.741,13.395 37.395,13.395 J7.G4@37.46,13.46 ; v1(36.319,14.746) 36.334,14.73 J7.G5@37.46,14.73 J7.H6@38.73,16 ; v1(36.474,59.199) 36.483,59.189 37.451,59.189 J7.G40@37.46,59.18 ; v1(36.483,49.012) 36.554,49.012 36.561,49.02 J7.G32@37.46,49.02 ; v1(36.483,52.83) J7.G35@37.46,52.83 ; v1(36.483,56.648) 36.491,56.64 J7.G38@37.46,56.64 ; v1(36.554,41.413) 36.56,41.406 37.454,41.406 J7.G26@37.46,41.4 ; v1(36.56,29.97) J7.G17@37.46,29.97 ; v1(36.56,37.602) 36.566,37.596 37.454,37.596 J7.G23@37.46,37.59 ; v1(36.561,45.21) J7.G29@37.46,45.21 ; v1(36.566,33.78) J7.G20@37.46,33.78 ; v1(36.67,22.35) J7.G11@37.46,22.35 ; v1(36.67,26.125) 36.705,26.16 J7.G14@37.46,26.16 ; v1(36.705,18.54) J7.G8@37.46,18.54 ; J7.G1@37.46,9.65 J7.H2@38.73,10.92 ; J7.H9@38.73,19.81 38.765,19.845 39.871,19.845 v1(39.906,19.881) ; J7.H12@38.73,23.62 38.778,23.62 39.299,23.1 39.586,23.1 v1(39.644,23.042) ; J7.H15@38.73,27.43 39.478,28.178 39.753,28.178 v1(39.81,28.235) ; J7.H18@38.73,31.24 38.737,31.247 39.644,31.247 39.809,31.413 v1(39.89,31.413) ; J7.H21@38.73,35.05 39.548,35.05 39.778,35.281 v1(39.859,35.281) ; J7.H24@38.73,38.86 v1(39.549,38.86) ; J7.H27@38.73,42.67 38.753,42.648 39.549,42.648 v1(39.571,42.625) ; J7.H30@38.73,46.48 39.335,47.085 39.938,47.085 v1(39.996,47.143) ; J7.H33@38.73,50.29 v1(39.599,50.29) ; J7.H36@38.73,54.1 v1(39.599,54.1) ; J7.H39@38.73,57.91 39.571,57.91 v1(39.599,57.937) ; v1(39.571,10.92) J7.H2@38.73,10.92 ; v1(39.571,12.157) 39.538,12.19 J7.H3@38.73,12.19 J7.H2@38.73,10.92 ; C18.1@58.767,26.786 v1(58.767,27.935)
  Bottom Layer w0.4: J7.C8@32.38,18.54 J7.C9@32.38,19.81 ; J7.D6@33.65,16 J7.D7@33.65,17.27
  other v2: 50.897,35.317 12.49,40.181
NetADP1715_4: ADP1715.4 C14.1 R1.1 R2.2 | length 5.6
  Top Layer w0.6: R2.2@19.016,57.541 19.03,57.527 20.551,57.527 R1.1@20.566,57.513 C14.1@20.566,58.688 ; C14.1@20.566,58.838 ADP1715.4@23.401,58.838
NetJ7_D30: J7.D30 J7.D31 | length 1.3
  Bottom Layer w0.5: J7.D30@33.65,46.48 J7.D31@33.65,47.75
V3p3: ADP1715.1 ADP1715.2 C13.2 J7.C39 J7.D36 J7.D38 J7.D40 | length 7.1
  Top Layer w0.3: v1(25.383,60.175) 25.383,60.139 24.922,59.678 ADP1715.2@24.922,58.838 ADP1715.1@25.572,58.838 25.796,58.838 v1(26.275,59.317)
  Bottom Layer w0.3: v1(31.321,57.891) 31.331,57.9 32.37,57.9 J7.C39@32.38,57.91 ; J7.D36@33.65,54.1 33.715,54.165 34.392,54.165 34.412,54.185 34.569,54.185 v1(34.626,54.243) ; J7.D38@33.65,56.64 33.658,56.648 34.605,56.648 v1(34.613,56.656) ; J7.D40@33.65,59.18 33.671,59.201 34.596,59.201 v1(34.617,59.222)
  other v1: 27.138,59.33 26.303,60.198 27.142,60.194 26.317,61.066 27.142,61.07
Vmem_low: ADP1715.3 C1.2 C2.2 C3.2 C4.2 C5.2 C6.2 C7.2 C8.2 C9.2 C10.2 C11.2 C12.2 C15.1 C16.2 C17.2 C18.2 C19.2 C20.2 C21.2 C22.2 C23.2 C24.2 C25.2 C26.2 C27.2 R1.2 U1.B4 U1.D1 U1.E4 U2.B4 U2.D1 U3.B4 U3.D1 U3.E4 U4.B4 U4.D1 U4.E4 U5.B4 U5.D1 U5.E4 U6.B4 U6.D1 U6.E4 U7.B4 U7.D1 U7.E4 U8.B4 U8.D1 U8.E4 | length 68.7
  Top Layer w0.2: U4.B4@12.997,13.755 v2@13.493,13.259 ; v2@48.89,36.299 U5.B4@49.387,35.802 ; U5.D1@52.387,37.8 53.168,37.8 53.333,37.965 v2(53.387,37.965) ; U8.B4@59,19 59,18.997 59.501,18.496 v2(59.501,18.493) ; U8.E4@59,22 59,22.806 59.386,23.192 59.386,24.115 v2(59.38,24.121) ; U6.E4@59,38.8 59,41.07 v2(59.374,41.444)
  Top Layer w0.25: U3.E4@9.998,22.417 v2@10.491,21.923 ; v2@10.436,48.464 10.436,48.058 U1.D1@10.995,47.5 ; v2(10.475,46.979) U1.D1@10.995,47.5 ; v2@10.496,24.918 U3.D1@10.995,25.417 ; v2(48.594,39.934) 49.387,39.141 U5.E4@49.387,38.8 ; v2@48.89,36.299 v2(48.89,36.301) ; U7.B4@49.387,19 v2@49.887,19.5 ; U7.E4@49.387,22 49.394,22.007 v2@49.394,22.722 ; U7.D1@52.387,21 52.898,21.511 v2@53.385,21.511 ; v2(58.52,35.317) 58.52,35.318 59,35.798 U6.B4@59,35.8 ; U8.D1@62,21 v2@62.715,21 ; U6.D1@62,37.8 62.019,37.819 62.546,37.819 62.692,37.965 v2(62.733,37.965)
  Top Layer w0.3: v2@9.484,13.252 9.987,13.755 U4.E4@9.995,13.755 9.995,13.75 10.483,13.262 v2(10.483,13.257) ; U3.E4@9.995,22.417 U3.E4@9.998,22.417 ; 9.995,35.601 v2(10.486,35.109) ; U1.E4@9.995,44.5 v2@10.493,44.998 ; v2@10.491,21.923 v2(10.494,21.923) ; U4.D1@10.995,16.755 10.995,16.748 11.495,16.248 v2(11.495,16.241) ; U2.D1@10.995,38.602 10.995,39.963 v2@11.41,40.378 ; v2(12.478,22.917) 12.486,22.917 12.986,22.417 U3.B4@12.995,22.417 13.001,22.417 13.496,21.922 v2(13.503,21.922) ; v2(12.478,44.993) 12.947,44.523 12.958,44.523 12.981,44.5 U1.B4@12.995,44.5 13.005,44.5 13.479,44.026 v2(13.489,44.026) ; v2(12.486,36.085) 12.946,35.625 12.958,35.625 12.981,35.602 U2.B4@12.995,35.602 12.995,35.594 13.485,35.104 v2(13.485,35.097) ; v2@13.493,13.259 v2(13.496,13.259)
  Top Layer w0.4: C15.1@24,61.5 24,60.564 24.272,60.292 ADP1715.3@24.272,58.838
  Top Layer w0.6: v1(20.543,53.862) 20.566,53.885 R1.2@20.566,55.913
  Bottom Layer w0.2: v2(53.387,37.965) 54.019,38.598 C11.2@54.334,38.598 ; C16.2@58.367,19.365 59.332,19.365 59.501,19.197 v2(59.501,18.493) ; C18.2@58.76,25.186 58.76,24.436 59.037,24.16 59.341,24.16 v2(59.38,24.121) ; v2(59.374,41.444) 59.374,42.282 C3.2@59.578,42.487
  Bottom Layer w0.25: C21.2@46.983,22.722 v2(49.386,22.722) ; C10.2@47.238,36.919 47.856,36.301 v2(48.89,36.301) ; C12.2@48.231,41.065 48.231,40.297 v2(48.594,39.934) ; C19.2@49.688,18.498 49.87,18.68 v2(49.87,19.493) ; C20.2@53.127,22.82 53.389,22.557 v2(53.389,21.507) ; C1.2@58.252,36.511 58.252,36.138 58.52,35.87 v2(58.52,35.317) ; v2(62.715,21.003) 64.097,21.003 C17.2@64.1,21 ; v2(62.733,37.965) 63.86,37.965 64.1,37.725 C2.2@64.1,37.025
  Bottom Layer w0.3: C25.2@9.138,45.38 10.055,45.38 10.431,45.004 v2(10.487,45.004) ; C23.2@9.548,15.2 9.848,15.5 10.248,15.5 10.949,16.201 11.455,16.201 v2(11.495,16.241) ; C7.2@9.881,22.902 10.485,22.299 10.485,21.933 v2(10.494,21.923) ; v2(10.432,48.469) C27.2@10.432,49.575 ; C24.2@10.483,12.23 v2(10.483,13.257) 10.523,13.217 v2@10.523,13.155 ; v2(10.486,35.109) 10.486,35.053 10.798,34.741 10.798,33.709 C5.2@10.794,33.705 ; v2(10.503,24.911) 10.543,24.951 10.543,25.023 11.195,25.675 C8.2@11.195,25.725 ; v2(11.379,40.38) 11.379,39.36 11.679,39.06 C6.2@11.69,39.06 ; C26.2@11.945,46.272 11.945,45.525 v2(12.478,44.993) ; v2(13.485,35.097) 14.804,35.097 C4.2@14.989,35.282 ; v2(13.496,13.259) 14.614,13.259 C22.2@14.825,13.471 ; v2(13.503,21.922) 14.567,22.987 C9.2@14.617,22.987
  other v1: 20.551,54.661 22.981,60.56 21.976,60.568 21.987,61.414 22.989,61.433
  other v2: 9.483,13.253
pads on no net: J7.C2 J7.C3 J7.C6 J7.C7 J7.C18 J7.C27 J7.C30 J7.C31 J7.C34 J7.C35 J7.C37 J7.D1 J7.D4 J7.D5 J7.D8 J7.D9 J7.D17 J7.D20 J7.D23 J7.D26 J7.D29 J7.D32 J7.D33 J7.D34 J7.D35 J7.G2 J7.G3 J7.G16 J7.G30 J7.G33 J7.G34 J7.G36 J7.G37 J7.G39 J7.H1 J7.H4 J7.H5 J7.H7 J7.H8 J7.H10 J7.H11 J7.H13 J7.H14 J7.H16 J7.H17 J7.H19 J7.H20 J7.H22 J7.H23 J7.H25 J7.H26 J7.H28 J7.H29 J7.H31 J7.H32 J7.H34 J7.H35 J7.H37 J7.H38 J7.H40 J7.MH1 J7.MH2 M1.1 M2.1 U1.A2 U1.A5 U1.B5 U1.C2 U1.C5 U2.A2 U2.A5 U2.B5 U2.C2 U2.C5 U2.z U3.A2 U3.A5 U3.B5 U3.C2 U3.C5 U4.A2 U4.A5 U4.B5 U4.C2 U4.C5 U5.A2 U5.A5 U5.B5 U5.C2 U5.C5 U6.A2 U6.A5 U6.B5 U6.C2 U6.C5 U6.ZZ U7.A2 U7.A5 U7.B5 U7.C2 U7.C5 U8.A2 U8.A5 U8.B5 U8.C2 U8.C5

## Polygon pours and split planes (outlines as drawn)
GND on Bottom Layer "GND_L04_P004" (solid, remove dead copper, pour order 4): 2.55,64.996 70.96,64.996 70.96,7.54 2.38,7.54 2.38,60.88 2.55,61.05
Vmem_low on Top Layer "VMEM_LOW_L01_P003" (solid, remove dead copper, pour order 3): 2.55,62 44.411,62 62.852,43.559 62.852,6.525 2.55,6.525 2.55,7 2.55,8.125
GND on GND (split plane): 71.747,68.443 71.863,68.416 71.974,68.37 72.076,68.307 72.167,68.23 72.244,68.139 72.307,68.037 72.353,67.926 72.38,67.81 72.389,67.704 72.388,67.691 72.388,1.27 72.389,1.257 72.38,1.151 72.353,1.035 72.307,0.924 72.244,0.822 72.167,0.731 72.076,0.654 71.974,0.591 71.863,0.545 71.747,0.518 71.641,0.509 71.628,0.51 1.27,0.51 1.257,0.509 1.151,0.518 1.035,0.545 0.924,0.591 0.822,0.654 0.731,0.731 0.654,0.822 0.591,0.924 0.545,1.035 0.518,1.151 0.509,1.257 0.51,1.27 0.51,67.437 0.509,67.45 0.517,67.57 0.543,67.7 0.586,67.826 0.644,67.945 0.718,68.055 0.806,68.155 0.906,68.243 1.016,68.317 1.135,68.375 1.261,68.418 1.391,68.444 1.511,68.452 1.524,68.451 71.628,68.451 71.641,68.452
GND on GND (split plane): 66.36,50.664 65.903,50.664 65.903,50.893 66.36,50.893
Vmem_low on PWR (split plane): 71.747,68.443 71.863,68.416 71.974,68.37 72.076,68.307 72.167,68.23 72.244,68.139 72.307,68.037 72.353,67.926 72.38,67.81 72.389,67.704 72.388,67.691 72.388,1.27 72.389,1.257 72.38,1.151 72.353,1.035 72.307,0.924 72.244,0.822 72.167,0.731 72.076,0.654 71.974,0.591 71.863,0.545 71.747,0.518 71.641,0.509 71.628,0.51 1.27,0.51 1.257,0.509 1.151,0.518 1.035,0.545 0.924,0.591 0.822,0.654 0.731,0.731 0.654,0.822 0.591,0.924 0.545,1.035 0.518,1.151 0.509,1.257 0.51,1.27 0.51,67.437 0.509,67.45 0.517,67.57 0.543,67.7 0.586,67.826 0.644,67.945 0.718,68.055 0.806,68.155 0.906,68.243 1.016,68.317 1.135,68.375 1.261,68.418 1.391,68.444 1.511,68.452 1.524,68.451 71.628,68.451 71.641,68.452
Vmem_low on PWR (split plane): 2598 vertices, not listed, extent 66.102,51.127 69.868,54.892
V3p3 on PWR (split plane): 35.353,53.686 28.918,53.686 24.977,57.627 24.977,63.648 35.353,63.648

## Keep-outs
Keep-Out Layer:
  lines w1: 0,1.27 ccw(c1.27,1.27) 1.27,0 71.628,0 ccw(c71.628,1.27) 72.898,1.27 72.898,67.691 ccw(c71.628,67.691) 71.628,68.961 69.898,68.961 1.524,68.961 ccw(c1.524,67.437) 0,67.437 0,1.27

## Other copper
Top Layer:
  rectangle net Vmem_low: 21.603,60.298 24.247,61.797
  rectangle net V3p3: 24.96,58.166 27.464,61.797
PWR (plane layer: these items are gaps in the copper):
  lines w0.4: 24.775,57.544 28.834,53.485 35.555,53.485 35.555,63.85 24.775,63.85 24.775,57.544

## Silkscreen, mask and mechanical layers (free items; w line width, h text height)
Top Overlay:
  drawing of 1009 lines, arcs and shapes, not listed
  text "DZ / IIS / D-ITET" at 48.149,62.216 h4
  text "8 X 64 Mbits" at 42.704,8.04 h2
  text "HyperRam" at 46.287,3.967 h2
  text "PULP FMC / Sensor Board" at 1.956,2.591 h2
Mechanical 4:
  lines w0: 0,0 0,69 72.85,69 72.85,0 0,0